# EAGLE board panel (EAGLE 9.6.2)

Size 128.5 x 10 mm. Coordinates in mm from the lower left corner, seen from the top.
Outline: 86.3,1.64 100.39,1.64 100.39,8.36 86.3,8.36 86.3,1.64
Copper layers (1*16): Top 0.035mm / dielectric 1.5mm / Bottom 0.035mm
Design rules "default": minimum track width 6mil, minimum drill 0.35mm, track to track 6mil, track to pad 6mil, pad to pad 6mil, via to via 6mil, smd to smd 6mil, copper to edge 40mil, drill to drill 6mil, minimum pad ring 10mil, minimum via ring 8mil, stop-mask expansion 4mil, vias tented up to drill 0mil, thermal gap 10mil
Holes 3.2 mm at 13.97,5
Holes 3 mm at 35.56,5 41.91,5

## Footprints (pad centres in the part's own frame; a part is rotated, then mirrored left to right if it is on the bottom)
PANEL_THONK_SOCKET = drill 6.1: P$1 0,0

## Placement (x,y rotation side)
E$1  [PANEL_THONK_SOCKET]  111.76,5 0 top
E$2  [PANEL_4HP]  0,0 0 top

## Library data of the parts
E$1 = MusicThingModular
E$2 = MusicThingModular_2hp